# Altium PCB HubBoard.PcbDoc
Units mm, origin at the board's own origin, x right, y up, seen from the top; angles counter-clockwise.
Board outline 36.05 x 88.5 mm, 2 copper layers (Top Layer, Bottom Layer); 12 components, 9 nets, 39 pads, 0 vias.
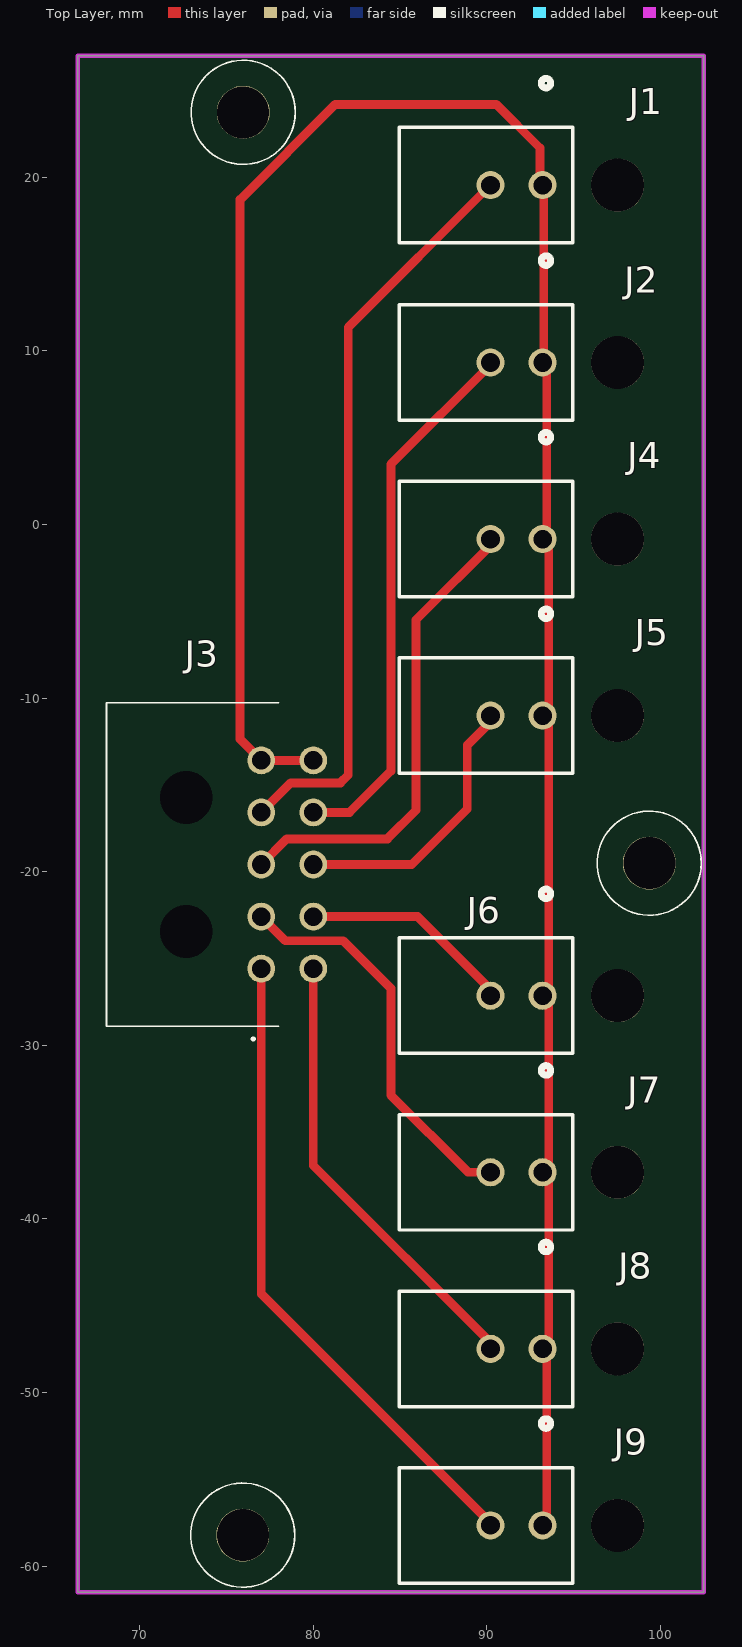
[diagram p0: Top Layer view]
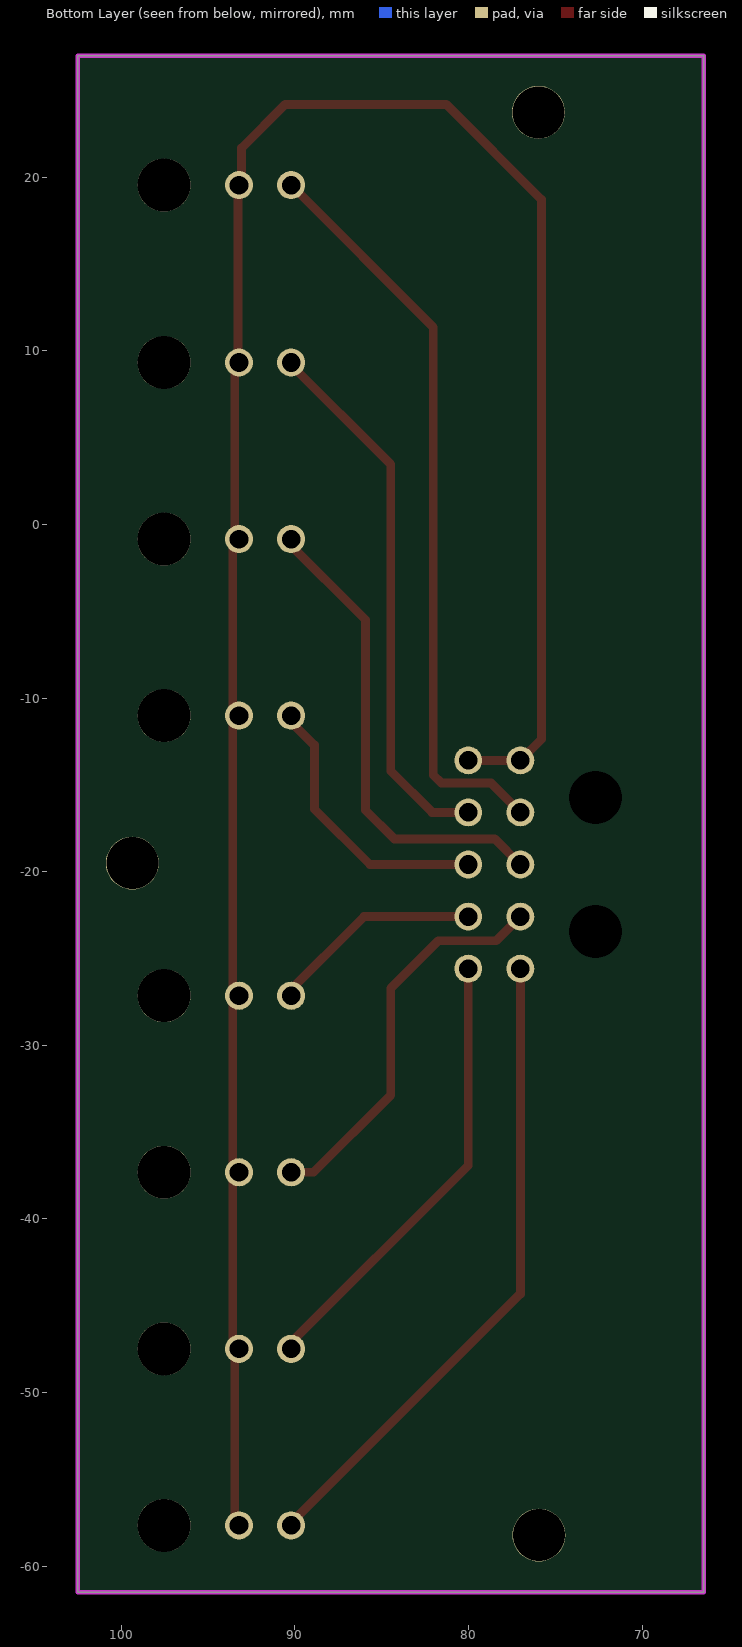
[diagram p1: Bottom Layer view, seen from below]
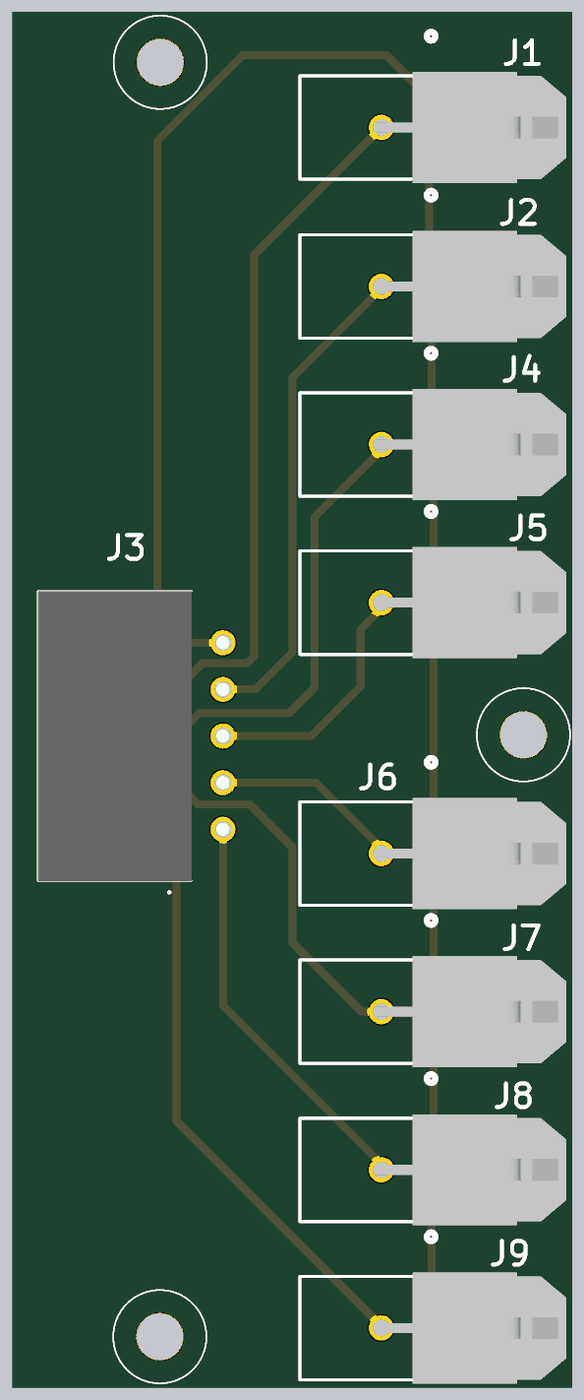
[diagram p2: 3D render of the assembled board from above, using the file's embedded part models]

## Layer stack, top to bottom
Top Solder: solder mask 0.0102, Solder Resist, Dk 3.5
Top Layer: signal copper 0.0356
Dielectric 1: dielectric 0.32, FR-4, Dk 4.8
Bottom Layer: signal copper 0.0356
Bottom Solder: solder mask 0.0102, Solder Resist, Dk 3.5

## Board outline
66.446,-61.5 102.5,-61.5 102.5,27 66.446,27

## Design rules (kind name [scope] priority, off if disabled: settings)
Clearance [All] p1: gap=0.008 ignorepadtopadclearanceinfootprint=TRUE
HoleSize [All] p1: absolutevalues=TRUE maxlimit=98.5 minlimit=0.025 maxpercent=80.000 minpercent=20.000
MinimumSolderMaskSliver [All] p1: minsoldermaskwidth=0.25
PolygonConnect [All] p1: connectstyle=Relief reliefconductorwidth=0.254 reliefentries=4 polygonreliefangle="90 Angle" airgapwidth=0.254
RoutingVias [All] p1: holewidth=0.711 width=1.27 viastyle="Through Hole" minholewidth=0.711 minwidth=1.27 maxholewidth=0.711 maxwidth=1.27
SolderMaskExpansion [All] p1: expansion=0.102 istentingtop=FALSE
UnRoutedNet [All] p1: checkbadconnections=TRUE
Width [All] p1: maxlimit=0.508 minlimit=0.254 preferedwidth=0.508
27 further rules are at their usual default settings.

## Classes and differential pairs
component class HubBoard: J1 J2 J3 J4 J5 J6 J7 J8 J9

## Components (designator, comment, footprint, x,y, rotation, side; value= is the part's Value field where it differs from the comment)
J1 "43045-0200" 43045-0200 97.536,19.558 r90 top
J2 "43045-0200" 43045-0200 97.536,9.336 r90 top
J3 "0430451000" 0430451000 77.01,-25.583 r270 top
J4 "43045-0200" 43045-0200 97.536,-0.836 r90 top
J5 "43045-0200" 43045-0200 97.536,-11.008 r90 top
J6 "43045-0200" 43045-0200 97.536,-27.141 r90 top
J7 "43045-0200" 43045-0200 97.536,-37.313 r90 top
J8 "43045-0200" 43045-0200 97.536,-47.484 r90 top
J9 "43045-0200" 43045-0200 97.536,-57.656 r90 top
MH1 "Mounting Hole" MOUNT-HOLE 75.946,-58.217 r0 top
MH2 "Mounting Hole" MOUNT-HOLE 75.971,23.749 r0 top
MH3 "Mounting Hole" MOUNT-HOLE 99.365,-19.507 r0 top

## Footprints (in the part's own frame and the unit in brackets; to place one, negate y for a bottom-side part, rotate by r counter-clockwise, add the part's x,y. Pads: shape width x height; smd on the part's side, far side on the other; paste and mask are expansions set on the pad)
43045-0200 [mm]
  round 1.62 hole 1.07: 1(0,4.32) 2(0,7.32)
  round 3.05 hole 3.05: 3(0,0)
  silkscreen extent -3.32,2.57 6.14,12.57, body extent -3.57,-4.6 3.57,7.64, height 8.25
0430451000 [mm]
  round 1.605 hole 1.07: 1(0,0) 2(-3,0) 3(-6,0) 4(-9,0) 5(-12,0) 6(0,3) 7(-3,3) 8(-6,3) 9(-9,3) 10(-12,3)
  round 1.525 hole 3.05 unplated: MH1(-9.85,-4.32) MH2(-2.15,-4.32)
  silkscreen extent -15.33,-8.92 4.1,0.99, body extent -15.33,-8.92 3.32,3.43, height 9.12
MOUNT-HOLE [mil] "#4, 0.116in"
  round 120 hole 118 unplated mask+1.97: 0(0,0)
  silkscreen extent -118,-118 118,118

## Part data
J1 J2 J4 J5 J6 J7 J8 J9: "Connector", Manufacturer_Name=Molex, Mouser Part Number=538-43045-0200, Datasheet Link=http://www.molex.com/webdocs/datasheets/pdf/en-us/0430450200_PCB_HEADERS.pdf, Manufacturer_Part_Number=43045-0200, Mouser Price/Stock=https://www.mouser.co.uk/ProductDetail/Molex/43045-0200?qs=4XSMV6Twtb0Q814SQfY6cQ%3D%3D
J3: "Connector", Manufacturer_Name=Molex, Arrow Part Number=0430451000, Arrow Price/Stock=https://www.arrow.com/en/products/0430451000/molex, Datasheet Link=https://www.molex.com/pdm_docs/sd/430451000_sd.pdf, Height=9.02mm, Manufacturer_Part_Number=0430451000
MH1 MH2 MH3: "#4 Screw, 0.116in Diameter"

## Nets (pads, with @x,y where several pads share a name; then routed paths per layer and width w, separated by ;. In a path a pad name is that pad's centre, name@x,y a point inside that pad or via, vN(x,y) a via of type N, cw(c..) or ccw(c..) an arc to the next point about the centre after c; other vN are vias at no path point)
GND: J1.1 J2.1 J3.5 J3.10 J4.1 J5.1 J6.1 J7.1 J8.1 J9.1 | length 136
  Top Layer w0.508: J3.10 J3.5 75.794,-12.367 75.794,18.72 81.28,24.206 90.551,24.206 93.066,21.692 93.066,19.708 J1.1 93.28,19.494 93.28,9.399 93.343,9.336 93.459,9.22 93.459,-0.72 93.574,-0.836 93.574,-11.008 93.574,-27.141 93.574,-37.313 93.574,-47.484 93.46,-47.599 93.46,-57.541 J9.1@93.345,-57.656
NetJ1_2: J1.2 J3.4 | length 43.3
  Top Layer w0.508: J3.4 78.709,-14.884 81.568,-14.884 82.023,-14.429 82.023,11.365 J1.2
NetJ2_2: J2.2 J3.9 | length 31.4
  Top Layer w0.508: J3.9 82.096,-16.583 84.48,-14.199 84.48,3.473 J2.2@90.343,9.336
NetJ3_1: J3.1 J9.2 | length 37.6
  Top Layer w0.508: J3.1 77.01,-44.321 J9.2@90.345,-57.656
NetJ3_2: J3.2 J7.2 | length 23.3
  Top Layer w0.508: J3.2 78.404,-23.978 81.737,-23.978 84.48,-26.721 84.48,-32.868 88.925,-37.313 J7.2@90.574,-37.313
NetJ3_3: J3.3 J4.2 | length 27.8
  Top Layer w0.508: J3.3 78.483,-18.11 84.277,-18.11 85.928,-16.459 85.928,-5.482 J4.2@90.574,-0.836
NetJ3_6: J3.6 J8.2 | length 26.3
  Top Layer w0.508: J3.6 80.01,-36.92 J8.2@90.574,-47.484
NetJ3_7: J3.7 J6.2 | length 12.5
  Top Layer w0.508: J3.7 86.017,-22.583 J6.2@90.574,-27.141
NetJ3_8: J3.8 J5.2 | length 16.3
  Top Layer w0.508: J3.8 85.674,-19.583 88.875,-16.383 88.875,-12.707 J5.2@90.574,-11.008
pads on no net: J1.3 J2.3 J3.MH1 J3.MH2 J4.3 J5.3 J6.3 J7.3 J8.3 J9.3 MH1.0 MH2.0 MH3.0

## Keep-outs
Keep-Out Layer:
  lines w0.254: 66.446,4.697 66.446,6.223 66.446,6.95 66.446,8.404 66.446,9.131 66.446,10.584 66.446,21.291 66.446,27 102.5,27 102.5,-61.5 66.446,-61.5 66.446,-39.197 66.446,4.697 ; 66.446,4.697 66.446,4.697